# Allegro board BVP_04V2.brd
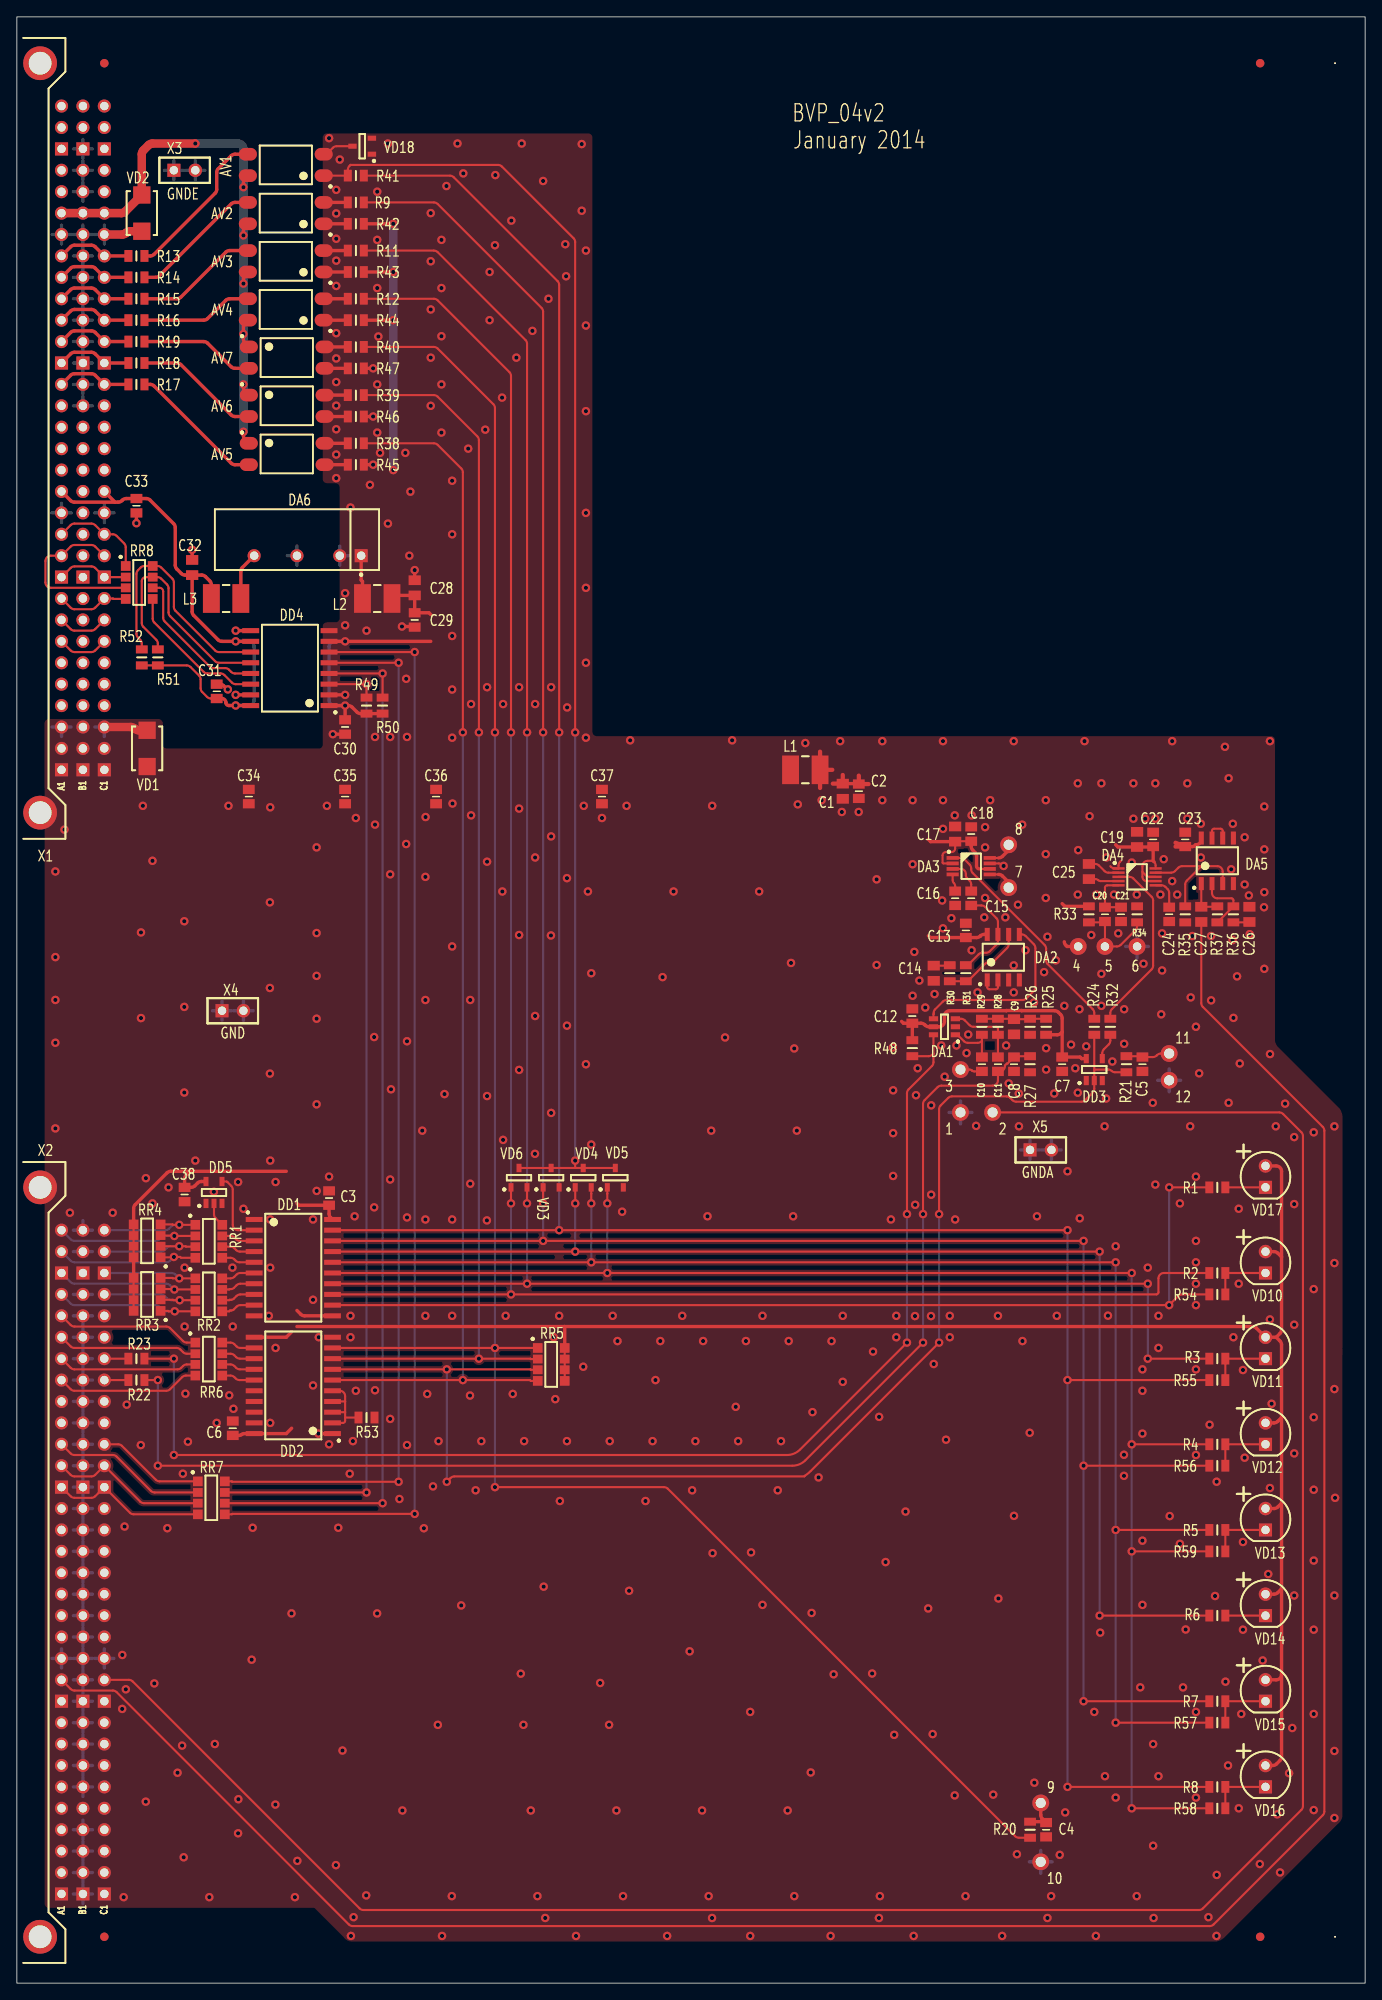
[diagram p0: board, top side]
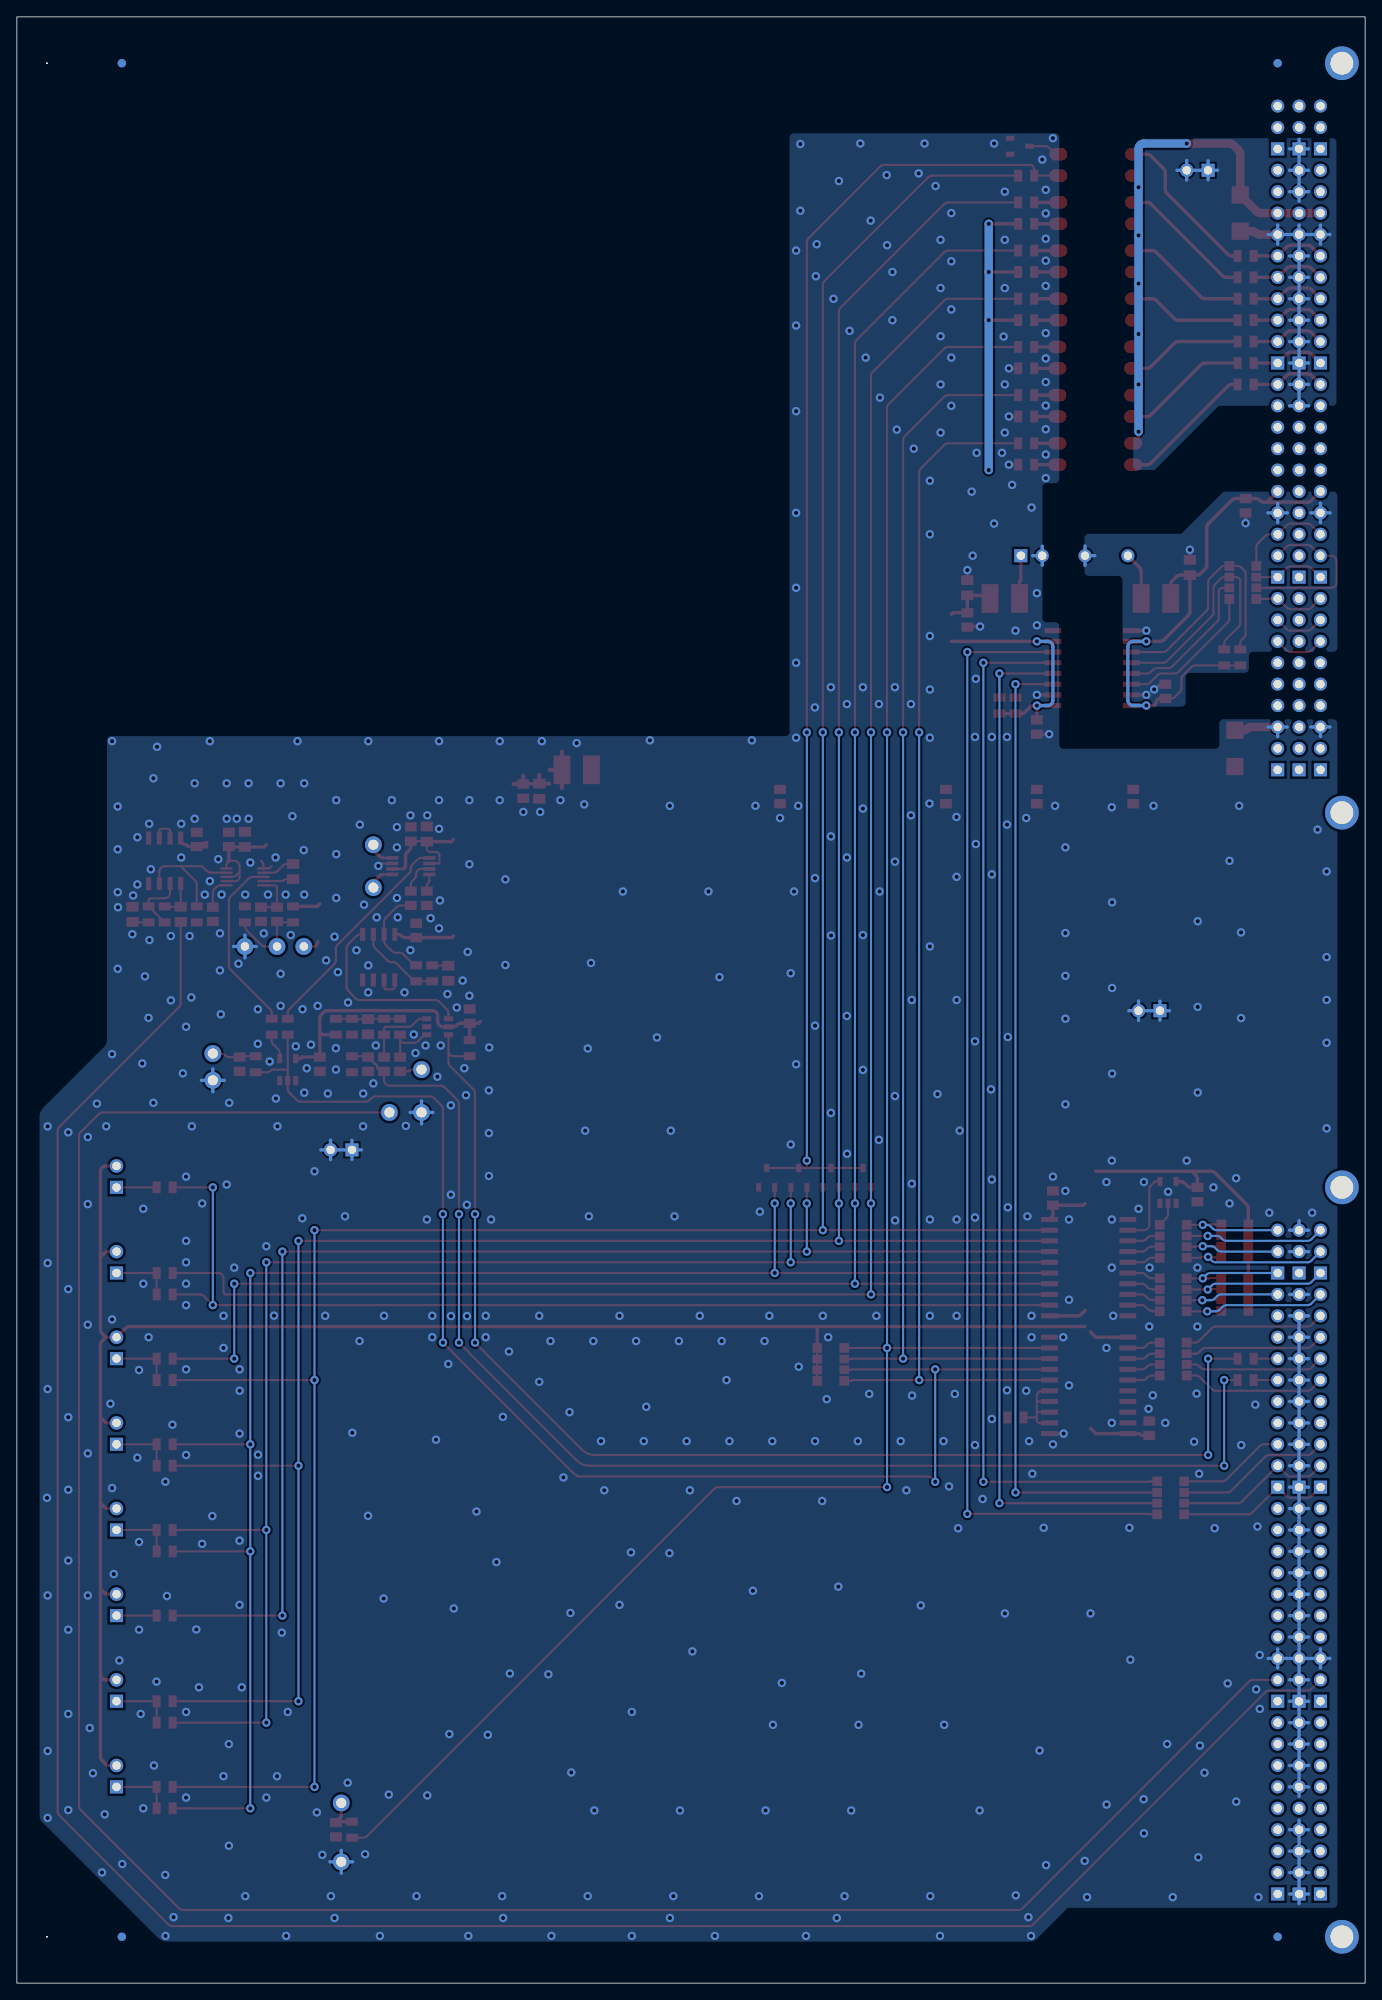
[diagram p1: board, bottom side, seen from below]

Outline 160 x 233.25 mm; copper layers: TOP, BOTTOM. Coordinates in mm from the lower left corner of the outline.
Outline path: rectangle 0,0 160,233.25

## Design rules (mm)
net group PWR: nets +5B +5BA +5BR +24BE GND GNDE GNDR

## Placement (name value [footprint] x y rotation side)
AV1  HCPL-817-300E  [SOIC254P1000X370-4N]  31.91 215.69 180 top
AV2  HCPL-817-300E  [SOIC254P1000X370-4N]  31.91 209.97 180 top
AV3  HCPL-817-300E  [SOIC254P1000X370-4N]  31.91 204.25 180 top
AV4  HCPL-817-300E  [SOIC254P1000X370-4N]  31.91 198.54 180 top
AV5  HCPL-817-300E  [SOIC254P1000X370-4N]  32.02 181.4 0 top
AV6  HCPL-817-300E  [SOIC254P1000X370-4N]  32.02 187.11 0 top
AV7  HCPL-817-300E  [SOIC254P1000X370-4N]  32.02 192.82 0 top
C1  10.0u  [CAPC2013X145N]  98.01 141.39 270 top
C2  0.1u  [CAPC2013X95N]  99.92 141.39 270 top
C3  0.1u  [CAPC2013X95N]  37.05 93.13 90 top
C4  0.1u  [CAPC2013X95N]  122.14 18.2 270 top
C5  0.1u  [CAPC2013X95N]  133.57 109 270 top
C6  0.1u  [CAPC2013X95N]  25.62 65.83 90 top
C7  0.1u  [CAPC2013X95N]  124.05 109 270 top
C8  1000p  [CAPC2013X95N]  118.33 109 270 top
C9  10.0u  [CAPC2013X145N]  118.33 113.45 270 top
C10  0.1u  [CAPC2013X95N]  114.52 109 90 top
C11  0.1u  [CAPC2013X95N]  116.42 109 270 top
C12  0.1u  [CAPC2013X95N]  106.27 114.72 270 top
C13  0.1u  [CAPC2013X95N]  112.61 124.88 270 top
C14  10.0u  [CAPC2013X145N]  108.81 119.8 270 top
C15  0.1u  [CAPC2013X95N]  113.25 128.69 90 top
C16  0.1u  [CAPC2013X95N]  111.34 128.69 90 top
C17  10.0u  [CAPC2013X145N]  111.34 136.31 90 top
C18  0.1u  [CAPC2013X95N]  113.25 136.31 270 top
C19  10.0u  [CAPC2013X145N]  132.94 135.68 90 top
C20  0.1u  [CAPC2013X95N]  129.12 126.78 90 top
C21  1000p  [CAPC2013X95N]  131.03 126.78 90 top
C22  0.1u  [CAPC2013X95N]  134.84 135.68 90 top
C23  0.1u  [CAPC2013X95N]  138.65 135.68 90 top
C24  2.2u  [CAPC2013X95N]  136.75 126.78 270 top
C25  10.0u  [CAPC2013X145N]  127.22 131.87 270 top
C26  10.0u  [CAPC2013X145N]  146.27 126.78 90 top
C27  10.0u  [CAPC2013X145N]  140.56 126.78 270 top
C28  10.0u  [CAPC2013X145N]  47.21 165.52 90 top
C29  0.1u  [CAPC2013X95N]  47.21 161.71 270 top
C30  0.1u  [CAPC2013X95N]  38.95 149.01 270 top
C31  0.1u  [CAPC2013X95N]  23.71 153.24 90 top
C32  10.0u  [CAPC2013X145N]  20.8 167.93 90 top
C33  0.1u  [CAPC2013X95N]  14.19 175.26 270 top
C34  0.1u  [CAPC2013X95N]  27.52 140.75 270 top
C35  0.1u  [CAPC2013X95N]  38.95 140.75 270 top
C36  0.1u  [CAPC2013X95N]  49.75 140.75 270 top
C37  0.1u  [CAPC2013X95N]  69.44 140.75 270 top
C38  0.1u  [CAPC2013X95N]  19.91 93.55 270 top
DA1  TS5A3160  [SOT95P280X145-6N]  110.08 113.45 180 top
DA2  AD8532  [SOIC127P600X175-8N]  117.06 121.7 90 top
DA3  SSM2301  [SOP65P490X110-8N]  113.25 132.5 0 top
DA4  SSM2167  [SOP50P490X110-10N]  132.94 131.23 0 top
DA5  AD8532  [SOIC127P600X175-8N]  142.46 133.13 90 top
DA6  TMA 0505S  [SIP720W50P254L1950H1050Q7P_S1KV]  33.24 171.24 270 top
DD1  74ACT573  [SOIC127P1030X265-20N]  32.81 84.88 0 top
DD2  74ACT573  [SOIC127P1030X265-20N]  32.81 70.91 180 top
DD3  SN74LVC1G14DBV  [SOT95P280X145-5N]  127.86 108.37 90 top
DD4  ADuM3402  [SOIC127P1032X265-16N]  32.4 156 180 top
DD5  SN74LVC1G14DBV  [SOT95P280X145-5N]  23.39 93.8 90 top
L1  10u  [INDC4532X280N]  93.56 143.93 0 top
L2  10u  [INDC4532X280N]  42.77 164.25 180 top
L3  10u  [INDC4532X280N]  24.83 164.25 180 top
MH1  1  [MTG_100_200]  111.98 103.29 0 top
MH2  2  [MTG_100_200]  115.79 103.29 0 top
MH3  3  [MTG_100_200]  111.98 108.37 0 top
MH4  4  [MTG_085_200]  125.95 122.97 0 top
MH5  5  [MTG_085_200]  129.12 122.97 0 top
MH6  6  [MTG_085_200]  132.94 122.97 0 top
MH7  7  [MTG_100_200]  117.69 129.96 0 top
MH8  8  [MTG_100_200]  117.69 135.04 0 top
MH9  9  [MTG_100_200]  121.5 21.38 0 top
MH10  10  [MTG_100_200]  121.5 14.39 0 top
MH11  11  [MTG_100_200]  136.75 110.28 0 top
MH12  12  [MTG_100_200]  136.75 107.1 0 top
NOREF  -  [unnamed]  147.54 5.5 0 top
NOREF#2  -  [unnamed]  10.38 5.5 0 top
NOREF#3  -  [unnamed]  10.38 227.75 0 top
NOREF#4  -  [unnamed#2]  156.43 227.75 0 top
NOREF#5  -  [unnamed#2]  156.43 5.5 0 top
NOREF#6  -  [unnamed]  147.54 227.75 0 top
NOREF#7  -  [unnamed]  10.38 5.5 180 bottom
NOREF#8  -  [unnamed]  10.38 227.75 180 bottom
NOREF#9  -  [unnamed]  147.54 227.75 180 bottom
NOREF#10  -  [unnamed]  147.54 5.5 180 bottom
R1  1k  [RESC2013X60N]  142.46 94.4 0 top
R2  5.1k  [RESC2013X60N]  142.46 84.24 0 top
R3  5.1k  [RESC2013X60N]  142.46 74.08 0 top
R4  5.1k  [RESC2013X60N]  142.46 63.92 0 top
R5  5.1k  [RESC2013X60N]  142.46 53.76 0 top
R6  5.1k  [RESC2013X60N]  142.46 43.6 0 top
R7  5.1k  [RESC2013X60N]  142.46 33.44 0 top
R8  5.1k  [RESC2013X60N]  142.46 23.28 0 top
R9  510  [RESC2013X60N]  40.23 211.24 180 top
R11  510  [RESC2013X60N]  40.23 205.53 180 top
R12  510  [RESC2013X60N]  40.23 199.81 180 top
R13  2k  [RESC2013X60N]  14.19 204.89 180 top
R14  2k  [RESC2013X60N]  14.19 202.35 180 top
R15  2k  [RESC2013X60N]  14.19 199.81 180 top
R16  2k  [RESC2013X60N]  14.19 197.27 180 top
R17  2k  [RESC2013X60N]  14.19 189.65 0 top
R18  2k  [RESC2013X60N]  14.19 192.19 0 top
R19  2k  [RESC2013X60N]  14.19 194.73 0 top
R20  100  [RESC2013X60N]  120.23 18.2 270 top
R21  100  [RESC2013X60N]  131.66 109 270 top
R22  100k  [RESC2013X60N]  14.19 71.54 0 top
R23  100  [RESC2013X60N]  14.19 74.08 0 top
R24  100  [RESC2013X60N]  127.86 113.45 90 top
R25  1k  [RESC2013X60N]  122.14 113.45 270 top
R26  1k  [RESC2013X60N]  120.23 113.45 90 top
R27  10k  [RESC2013X60N]  120.23 109 270 top
R28  100k  [RESC2013X60N]  116.42 113.45 270 top
R29  100k  [RESC2013X60N]  114.52 113.45 270 top
R30  10k  [RESC2013X60N]  110.71 119.8 270 top
R31  20k  [RESC2013X60N]  112.61 119.8 90 top
R32  100  [RESC2013X60N]  129.76 113.45 90 top
R33  5.1k  [RESC2013X60N]  127.22 126.78 90 top
R34  20k  [RESC2013X60N]  132.94 126.78 270 top
R35  20k  [RESC2013X60N]  138.65 126.78 90 top
R36  10k  [RESC2013X60N]  144.37 126.78 90 top
R37  20k  [RESC2013X60N]  142.46 126.78 90 top
R38  51  [RESC2013X60N]  40.23 182.66 0 top
R39  51  [RESC2013X60N]  40.23 188.38 0 top
R40  51  [RESC2013X60N]  40.23 194.09 0 top
R41  1k  [RESC2013X60N]  40.23 214.41 180 top
R42  510  [RESC2013X60N]  40.23 208.7 180 top
R43  510  [RESC2013X60N]  40.23 202.99 180 top
R44  510  [RESC2013X60N]  40.23 197.27 180 top
R45  51  [RESC2013X60N]  40.23 180.12 0 top
R46  51  [RESC2013X60N]  40.23 185.84 0 top
R47  51  [RESC2013X60N]  40.23 191.56 0 top
R48  10k  [RESC2013X60N]  106.27 110.91 90 top
R49  10k  [RESC2013X60N]  41.49 151.55 270 top
R50  10k  [RESC2013X60N]  43.4 151.55 270 top
R51  10k  [RESC2013X60N]  16.73 157.26 270 top
R52  10k  [RESC2013X60N]  14.82 157.26 270 top
R53  10k  [RESC2013X60N]  41.49 67.09 180 top
R54  5.1k  [RESC2013X60N]  142.46 81.7 0 top
R55  5.1k  [RESC2013X60N]  142.46 71.54 0 top
R56  5.1k  [RESC2013X60N]  142.46 61.38 0 top
R57  5.1k  [RESC2013X60N]  142.46 30.9 0 top
R58  5.1k  [RESC2013X60N]  142.46 20.74 0 top
R59  5.1k  [RESC2013X60N]  142.46 51.22 0 top
RR1  100  [RESCAX127P320X508X70-8N]  22.77 88 0 top
RR2  100  [RESCAX127P320X508X70-8N]  22.77 81.65 0 top
RR3  10k  [RESCAX127P320X508X70-8N]  15.46 81.7 180 top
RR4  10k  [RESCAX127P320X508X70-8N]  15.46 88.05 180 top
RR5  10k  [RESCAX127P320X508X70-8N]  63.41 73.39 0 top
RR6  100  [RESCAX127P320X508X70-8N]  22.77 74.03 0 top
RR7  100  [RESCAX127P320X508X70-8N]  23.08 57.57 0 top
RR8  100  [RESCAX127P320X508X70-8N]  14.52 166.16 0 top
VD1  6.8B  [DIOM5236X261N_NP]  15.46 146.47 90 top
VD2  30B  [DIOM5236X261N_NP]  14.82 209.97 270 top
VD3  BAT54A  [SOT95P230X110-3N]  63.4 95.55 90 top
VD4  BAT54A  [SOT95P230X110-3N]  67.21 95.55 90 top
VD5  BAT54A  [SOT95P230X110-3N]  71.02 95.55 90 top
VD6  BAT54A  [SOT95P230X110-3N]  59.59 95.55 90 top
VD10  Red  [LEDRD254W60D590H900USR]  148.18 85.51 90 top
VD11  Red  [LEDRD254W60D590H900USR]  148.18 75.35 90 top
VD12  Red  [LEDRD254W60D590H900USR]  148.18 65.19 90 top
VD13  Red  [LEDRD254W60D590H900USR]  148.18 55.03 90 top
VD14  Red  [LEDRD254W60D590H900USR]  148.18 44.87 90 top
VD15  Red  [LEDRD254W60D590H900USR]  148.18 34.71 90 top
VD16  Red  [LEDRD254W60D590H900USR]  148.18 24.55 90 top
VD17  Green  [LEDRD254W60D590H900USR]  148.18 95.67 90 top
VD18  BAT54A  [SOT95P230X110-3N]  40.98 217.91 180 top
X1  DIN-32x3  [DIN_41612_96_MR]  2.12 183.3 0 top
X2  DIN-32x3  [DIN_41612_96_MR]  2.12 49.95 0 top
X3  GNDE  [HDRV1X2P254]  19.91 215.05 0 top
X4  GND  [HDRV1X2P254]  25.62 115.36 0 top
X5  GNDA  [HDRV1X2P254]  121.5 98.84 0 top

## Library data of the parts
AV1-AV7 = K1010: alternate symbols: (SOIC254P1000X370-4M)
C1-C38 = CAP_NP
DA1 = TS5A3159_g
DA2 DA5 = AD8532AR_G
DA3 = SSM2301_G
DA4 = SSM2167_G
DA6 = SIP7_SINGLE_4_6
DD1 DD2 = 74ACT573
DD3 DD5 = 74LVC1G14_G
DD4 = ADUM3402
L1-L3 = INDUCTOR
MH1-MH12 = MOUNTING_HOLE_PLATED
R1-R9 R11-R59 = RES_0.125W
RR1-RR8 = RES_ARRAY_4
VD1 VD2 = DIODE_TVS_BI
VD3-VD6 VD18 = DIODE_SCHOTTKY_DUAL_A
VD10-VD17 = DIODE_LED
X1 X2 = CON_32x3
X3-X5 = CON_2

## Footprints (pads in the part's own frame, mm; a bottom-side part is the same pattern mirrored in y, then rotated)
CAPC2013X95N
  rect 1.1x1.4 smd: 1(-0.85,0) 2(0.85,0)
CAPC2013X145N
  rect 1.15x1.45 smd: 1(-0.9,0) 2(0.9,0)
DIN_41612_96_MR
  rect 1.55x1.55 hole 1: A1(3.175,-39.37) A10(3.175,-16.51) A20(3.175,8.89) A30(3.175,34.29) B1(5.715,-39.37) B10(5.715,-16.51) B20(5.715,8.89) B30(5.715,34.29) C1(8.255,-39.37) C10(8.255,-16.51) C20(8.255,8.89) C30(8.255,34.29)
  round 1.55 hole 1: A2(3.175,-36.83) A3(3.175,-34.29) A4(3.175,-31.75) A5(3.175,-29.21) A6(3.175,-26.67) A7(3.175,-24.13) A8(3.175,-21.59) A9(3.175,-19.05) A11(3.175,-13.97) A12(3.175,-11.43) A13(3.175,-8.89) A14(3.175,-6.35) A15(3.175,-3.81) A16(3.175,-1.27) A17(3.175,1.27) A18(3.175,3.81) A19(3.175,6.35) A21(3.175,11.43) A22(3.175,13.97) A23(3.175,16.51) A24(3.175,19.05) A25(3.175,21.59) A26(3.175,24.13) A27(3.175,26.67) A28(3.175,29.21) A29(3.175,31.75) A31(3.175,36.83) A32(3.175,39.37) B2(5.715,-36.83) B3(5.715,-34.29) B4(5.715,-31.75) B5(5.715,-29.21) B6(5.715,-26.67) B7(5.715,-24.13) B8(5.715,-21.59) B9(5.715,-19.05) B11(5.715,-13.97) B12(5.715,-11.43) B13(5.715,-8.89) B14(5.715,-6.35) B15(5.715,-3.81) B16(5.715,-1.27) B17(5.715,1.27) B18(5.715,3.81) B19(5.715,6.35) B21(5.715,11.43) B22(5.715,13.97) B23(5.715,16.51) B24(5.715,19.05) B25(5.715,21.59) B26(5.715,24.13) B27(5.715,26.67) B28(5.715,29.21) B29(5.715,31.75) B31(5.715,36.83) B32(5.715,39.37) C2(8.255,-36.83) C3(8.255,-34.29) C4(8.255,-31.75) C5(8.255,-29.21) C6(8.255,-26.67) C7(8.255,-24.13) C8(8.255,-21.59) C9(8.255,-19.05) C11(8.255,-13.97) C12(8.255,-11.43) C13(8.255,-8.89) C14(8.255,-6.35) C15(8.255,-3.81) C16(8.255,-1.27) C17(8.255,1.27) C18(8.255,3.81) C19(8.255,6.35) C21(8.255,11.43) C22(8.255,13.97) C23(8.255,16.51) C24(8.255,19.05) C25(8.255,21.59) C26(8.255,24.13) C27(8.255,26.67) C28(8.255,29.21) C29(8.255,31.75) C31(8.255,36.83) C32(8.255,39.37)
  round 4 hole 2.7: HOLE1(0.635,-44.45) HOLE2(0.635,44.45)
DIOM5236X261N_NP
  rect 2.05x2.05 smd: A(2.15,0) C(-2.15,0)
HDRV1X2P254
  rect 1.55x1.55 hole 1: 1(-1.27,0)
  round 1.6 hole 1: 2(1.27,0)
INDC4532X280N
  rect 2x3.4 smd: 1(-1.75,0) 2(1.75,0)
LEDRD254W60D590H900USR
  round 1.6 hole 1: A(1.27,0)
  rect 1.55x1.55 hole 1: C(-1.27,0)
MTG_085_200
  round 2 hole 1: 1(0,0)
MTG_100_200
  round 2 hole 1.2: 1(0,0)
RESC2013X60N
  rect 0.95x1.4 smd: 1(-0.95,0) 2(0.95,0)
RESCAX127P320X508X70-8N
  rect 1.15x1.15 smd: 1(-1.6,1.955) 4(-1.6,-1.955) 5(1.6,-1.955) 8(1.6,1.955)
  rect 1.15x1.05 smd: 2(-1.6,0.635) 3(-1.6,-0.635) 6(1.6,-0.635) 7(1.6,0.635)
SIP720W50P254L1950H1050Q7P_S1KV
  rect 1.55x1.55 hole 1: 1(1.905,7.62)
  round 1.55 hole 1: 2(1.905,5.08) 4(1.905,0) 6(1.905,-5.08)
SOIC127P600X175-8N
  rect 1.55x0.6 smd: 1(-2.7,1.905) 2(-2.7,0.635) 3(-2.7,-0.635) 4(-2.7,-1.905) 5(2.7,-1.905) 6(2.7,-0.635) 7(2.7,0.635) 8(2.7,1.905)
SOIC127P1030X265-20N
  rect 2x0.6 smd: 1(-4.65,5.715) 2(-4.65,4.445) 3(-4.65,3.175) 4(-4.65,1.905) 5(-4.65,0.635) 6(-4.65,-0.635) 7(-4.65,-1.905) 8(-4.65,-3.175) 9(-4.65,-4.445) 10(-4.65,-5.715) 11(4.65,-5.715) 12(4.65,-4.445) 13(4.65,-3.175) 14(4.65,-1.905) 15(4.65,-0.635) 16(4.65,0.635) 17(4.65,1.905) 18(4.65,3.175) 19(4.65,4.445) 20(4.65,5.715)
SOIC127P1032X265-16N
  rect 2x0.6 smd: 1(-4.65,4.445) 2(-4.65,3.175) 3(-4.65,1.905) 4(-4.65,0.635) 5(-4.65,-0.635) 6(-4.65,-1.905) 7(-4.65,-3.175) 8(-4.65,-4.445) 9(4.65,-4.445) 10(4.65,-3.175) 11(4.65,-1.905) 12(4.65,-0.635) 13(4.65,0.635) 14(4.65,1.905) 15(4.65,3.175) 16(4.65,4.445)
SOIC254P1000X370-4N
  oval 2.15x1.5 smd: 1(-4.5,1.27) 2(-4.5,-1.27) 3(4.5,-1.27) 4(4.5,1.27)
SOP50P490X110-10N
  rect 1.45x0.3 smd: 1(-2.2,1) 2(-2.2,0.5) 3(-2.2,0) 4(-2.2,-0.5) 5(-2.2,-1) 6(2.2,-1) 7(2.2,-0.5) 8(2.2,0) 9(2.2,0.5) 10(2.2,1)
SOP65P490X110-8N
  rect 1.45x0.45 smd: 1(-2.2,0.975) 2(-2.2,0.325) 3(-2.2,-0.325) 4(-2.2,-0.975) 5(2.2,-0.975) 6(2.2,-0.325) 7(2.2,0.325) 8(2.2,0.975)
SOT95P230X110-3N
  rect 1x0.6 smd: 1(-1.15,0.95) 2(-1.15,-0.95) 3(1.15,0)
SOT95P280X145-5N
  rect 1.1x0.6 smd: 1(-1.3,0.95) 2(-1.3,0) 3(-1.3,-0.95) 4(1.3,-0.95) 5(1.3,0.95)
SOT95P280X145-6N
  rect 1.1x0.6 smd: 1(-1.3,0.95) 2(-1.3,0) 3(-1.3,-0.95) 4(1.3,-0.95) 5(1.3,0) 6(1.3,0.95)
unnamed
  round 1 smd: (0,0)
unnamed#2
  round 0.2 hole 2.7 unplated: (0,0)

## Nets
GND: C1.2 C2.2 C3.2 C4.2 C5.2 C6.2 C7.2 C8.2 C9.2 C12.1 C13.1 C14.2 C16.1 C17.2 C18.1 C19.2 C21.1 C22.2 C23.2 C24.2 C26.2 C28.2 C29.2 C30.2 C34.2 C35.2 C36.2 C37.2 C38.2 DA1.2(GND) DA2.3(IN+) DA2.4(GND) DA3.7(GND) DA4.1(GND) DA5.4(GND) DA5.5(IN+) DA6.2(-VIN) DD1.1(O\E\) DD1.10(GND) DD2.1(O\E\) DD2.10(GND) DD3.3(GND) DD4.2(1GND1) DD4.8(2GND1) DD5.3(GND) MH1.1 MH6.1 MH10.1 MH12.1 R26.1 R27.2 R34.1 R35.1 R45.2 R46.2 R47.2 R53.1 VD1.A VD18.1(C1) X1.A3 X1.C3 X2.A12 X2.B1 X2.B2 X2.B3 X2.B4 X2.B6 X2.B7 X2.B8 X2.B9 X2.B10 X2.B11 X2.B12 X2.B13 X2.B14 X2.B15 X2.B16 X2.B17 X2.B18 X2.B19 X2.B20 X2.B21 X2.B22 X2.B23 X2.B24 X2.B25 X2.B26 X2.B27 X2.B28 X2.B29 X2.B30 X2.B31 X2.B32 X2.C12 X4.1 X4.2 X5.1 X5.2
GNDE: VD2.A X1.A26 X1.B15 X1.B16 X1.B17 X1.B18 X1.B19 X1.B20 X1.B21 X1.B22 X1.B23 X1.B24 X1.B25 X1.B26 X1.B28 X1.B29 X1.B30 X1.B31 X1.B32 X1.C26 X3.1 X3.2
GNDR: C31.2 C32.2 C33.2 DA6.4(-VOUT) DD4.9(2GND2) DD4.15(1GND2) X1.A13 X1.C13
1#PRD: R15.2 X1.A23 X1.C23
1#PRM: R16.2 X1.A22 X1.C22
1#WARN: R14.2 X1.A24 X1.C24
1ALARM: R13.2 X1.A25 X1.C25
1CLEAR: R18.1 X1.A20 X1.C20
1CTRLTM: R17.1 X1.A19 X1.C19
1PUSK: R19.1 X1.A21 X1.C21
1RXDR: X1.A8 X1.C8
1RXLN: RR8.2 X1.A10 X1.C10
1RXTM: RR8.1 X1.A12 X1.C12
1TXDR: X1.A7 X1.C7
1TXLN: RR8.4 X1.A9 X1.C9
1TXTM: RR8.3 X1.A11 X1.C11
+5B: C3.1 C6.1 C28.1 C29.1 C30.1 C34.1 C35.1 C36.1 C37.1 C38.1 DD1.11(LE) DD1.20(VCC) DD2.11(LE) DD2.20(VCC) DD4.1(VCC1) DD4.7(EN1) DD5.5(VCC) L1.1 L2.1 R42.1 R43.1 R44.1 R49.2 R50.2 RR3.5 RR3.6 RR3.7 RR3.8 RR4.5 RR4.6 RR4.7 RR4.8 RR5.5 RR5.6 RR5.7 RR5.8 VD1.C VD10.A VD11.A VD12.A VD13.A VD14.A VD15.A VD16.A VD17.A X1.A1 X1.A2 X1.C1 X1.C2
+5BA: C1.1 C2.1 C7.1 C12.2 C13.2 C17.1 C18.2 C19.1 C22.1 C23.1 DA1.5(VCC) DA2.8(VCC) DA3.2(G) DA3.6(VCC) DA4.7(GATE) DA4.8(CMP) DA4.10(VCC) DA5.8(VCC) DD3.5(VCC) L1.2 MH4.1 R25.2 R33.2 R48.2
+5BR: C31.1 C32.1 C33.1 DD4.10(EN2) DD4.16(VCC2) L3.2 R51.2 R52.2 X1.A14 X1.C14
+24BE: AV1.4 AV2.4 AV3.4 AV4.4 AV5.1 AV6.1 AV7.1 VD2.C X1.A27 X1.B27 X1.C27
BUSR4: RR6.1 X2.A28
BUSR5: RR6.2 X2.A27
BUSR6: RR6.3 X2.A26
BUSR7: RR6.4 X2.A25
BUSW4: X2.C28
BUSW5: X2.C27
BUSW6: R23.1 X2.C26
BUSW7: R22.1 X2.C25
D#AC: DD1.17(Q3) R6.1 VD4.1(C1)
D#CONTROL: DD1.12(Q8) R1.1 R54.1
D#CURRENT: DD1.13(Q7) R2.1 R12.1 VD6.1(C1)
D#DISTPRM: DD1.16(Q4) R5.1 R57.1 VD4.2(C2)
D#HFRESTORE: DD1.14(Q6) R3.1 R11.1 VD6.2(C2)
D#SELFPRM: DD1.15(Q5) R4.1 R58.1 R59.1 VD5.1(C1)
D#WARN: DD1.18(Q2) R7.1 R9.1 R56.1 VD3.1(C1)
DALARM: DD1.19(Q1) R8.1 R41.1 R55.1
EN_AMP: DD2.7(D6) DD3.2(IN) R21.2 R24.1 RR5.3
EN_MCU: DD3.4(OUT) R32.1
RXLN: RR7.2 X2.A22
RXTALK: C27.2 X2.A11
RXTM: RR7.4 X2.A20 X2.C20
SOUT0: RR2.4 RR3.1 X2.A29
SOUT1: RR2.3 RR3.2 X2.C29
SOUT2: RR2.2 RR3.3 X2.A30
SOUT3: RR2.1 RR3.4 X2.C30
SOUT4: RR1.4 RR4.1 X2.A31
SOUT5: RR1.3 RR4.2 X2.C31
SOUT6: RR1.2 RR4.3 X2.A32
SOUT7: RR1.1 RR4.4 X2.C32
TXLN: RR7.1 X2.C22
TXTALK: MH2.1 X2.C11
TXTM: RR7.3 X2.A21 X2.C21
N00551: AV7.3 R47.1
N01225: DD4.3(INA) R49.1 RR7.7
N01244: DD4.5(OUTC) RR7.8
N01250: DD4.6(OUTD) RR7.5
N01425: DD4.13(OUTB) RR8.6
N01429: DD4.12(INC) R51.1 RR8.7
N01441: DD4.11(IND) R52.1 RR8.8
N01449: DD4.14(OUTA) RR8.5
N02822: DA6.6(+VOUT) L3.1
N02871: DA6.1(+VIN) L2.2
N73819: DD2.8(D7) R39.2 RR5.2
N73834: DD2.9(D8) R20.2 R40.2 RR5.1
N73844: AV6.3 R46.1
N73856: AV5.3 R45.1
N77519: C10.2 DA1.1(NO) R29.2
N77917: DA1.6(#) R23.2 R48.1
N79355: R1.2 VD17.C
N79397: R2.2 R54.2 VD10.C
N79439: R3.2 R55.2 VD11.C
N79481: R4.2 R56.2 VD12.C
N79523: R5.2 R59.2 VD13.C
N79549: R6.2 VD14.C
N79567: DA1.4(COM) DA2.5(IN+)
N79607: R7.2 R57.2 VD15.C
N79649: R8.2 R58.2 VD16.C
N79970: C15.1 DA2.7(OUT) R31.2
N79985: DA2.6(IN-) R30.2 R31.1
N80056: C14.1 R30.1
N80092: DA2.1(OUT) DA2.2(IN-)
N80558: C15.2 DA3.3(IN+)
N80562: C16.2 DA3.4(IN-)
N80654: AV1.3 R13.1
N80678: DA3.1(EN) R24.2
N80919: AV2.3 R14.1
N81113: AV3.3 R15.1
N81310: AV4.3 R16.1
N82115: AV2.2 R9.2
N82193: AV3.2 R11.2
N82271: AV4.2 R12.2
N83320: C9.1 R25.1 R26.2 R28.1 R29.1
N83604: C11.1 DA1.3(NC) R28.2
N83683: AV3.1 R43.2
N83687: AV4.1 R44.2
N83741: AV2.1 R42.2
N85109: C8.1 C11.2 R22.2 R27.1
N94026: DA3.5(OUT+) MH7.1
N94035: DA3.8(OUT-) MH8.1
N96238: C20.2 C21.2 DA4.5(IN)
N96360: C25.1 DA4.2(VCA)
N96364: C25.2 DA4.4(BUF)
N96415: C24.1 DA4.6(AVG)
N96583: DA4.3(EN) R32.2
N96714: DA4.9(OUT) DA5.3(IN+) R35.2
N97065: C27.1 DA5.1(OUT) R37.2
N97073: DA5.2(IN-) R36.2 R37.1
N97121: C26.1 R36.1
N97223: DA5.6(IN-) DA5.7(OUT)
N99861: C20.1 MH5.1 R33.1 R34.2
N109598: AV1.1 R41.2 VD3.3(M) VD4.3(M) VD5.3(M) VD6.3(M)
N127058: DD4.4(INB) R50.1 RR7.6
N133699: C10.1 MH3.1
N148228: DD1.3(D2) RR1.7
N148236: DD1.4(D3) RR1.6
N148244: DD1.5(D4) RR1.5
N172935: AV5.4 R38.1
N172939: DD2.6(D5) R38.2 RR5.4
N172947: AV6.4 R39.1
N172960: AV7.4 R40.1
N176118: DD2.15(Q5) RR6.5
N176122: DD2.14(Q6) RR6.6
N176130: DD2.13(Q7) RR6.7
N176164: DD2.12(Q8) RR6.8
N178870: DD1.6(D5) RR2.8
N178876: DD1.7(D6) RR2.7
N178882: DD1.9(D8) RR2.5
N178888: DD1.8(D7) RR2.6
N182039: AV6.2 R18.2
N182065: AV7.2 R19.2
N182113: AV5.2 R17.2
N182772: DD2.2(D1) DD2.3(D2) DD2.4(D3) DD2.5(D4) R53.2
N194967: DD5.2(IN) RR1.8
N194988: DD1.2(D1) DD5.4(OUT)
N204692: C4.1 MH9.1 R20.1
N206929: C5.1 MH11.1 R21.1
N208084: AV1.2 VD18.3(M)

Pads without a net: DD2 16 17 18 19; DD3 1; DD5 1; VD3 2; VD5 2; VD18 2; X1 A4 A5 A6 A15 A16 A17 A18 A28 A29 A30 A31 A32 B1 B2 B3 B4 B5 B6 B7 B8 B9 B10 B11 B12 B13 B14 C4 C5 C6 C15 C16 C17 C18 C28 C29 C30 C31 C32 HOLE1 HOLE2; X2 A1 A2 A3 A4 A5 A6 A7 A8 A9 A10 A13 A14 A15 A16 A17 A18 A19 A23 A24 B5 C1 C2 C3 C4 C5 C6 C7 C8 C9 C10 C13 C14 C15 C16 C17 C18 C19 C23 C24 HOLE1 HOLE2

## Via types
v1: diameter 1, hole 0.5, TOP to BOTTOM, 683 vias

## Routing (per net, layer and track width the routed paths; a pad name or vN(x,y) marks a point on that pad's centre or on a via; arc(x,y) is an arc through that point)
GND: length 207.6
  TOP w0.25: DA3.7 116.54,132.82 arc(116.78,132.78) 116.99,132.64 v1(117.1,132.53) ; 129.76,132.5 129.84,132.42 arc(130.05,132.28) 130.29,132.23 DA4.1 130.74,132.58 arc(130.78,132.82) 130.92,133.03 131.03,133.13
  TOP w0.4: C30.2 v1(37.5,148.16) ; R47.2 v1(42.28,191.56) ; R46.2 v1(42.28,185.84) ; R45.2 v1(42.28,180.12) ; C28.2 v1(47.21,167.62) ; C29.2 47.14,160.93 v1(45.7,160.93) ; DD2.1 v1(35.78,65.19) ; DD4.2 v1(38.95,152.82)
  TOP w1: X1.C3 13.53,149.01 arc(13.77,148.96) 13.98,148.82 14,148.81 arc(14.2,148.67) 14.45,148.62 VD1.A
  BOTTOM w0.4: X2.C12 11.51,38.52 ; X2.C12 10.38,37.39 ; X2.C12 10.38,39.65 ; X2.C12 9.25,38.52 ; 131.58,122.97 MH6.1 ; MH6.1 132.94,124.33 ; MH6.1 132.94,121.62 ; MH6.1 134.29,122.97 ; MH12.1 138.1,107.1 ; MH12.1 136.75,108.45 ; MH12.1 136.75,105.75 ; MH12.1 135.39,107.1 ; X2.B7 8.97,25.82 ; X2.B7 6.71,25.82 ; X2.B7 7.84,24.69 ; X2.B7 7.84,26.95 ; 6.71,46.14 X2.B15 ; X2.B15 7.84,45.01 ; X2.B15 7.84,47.27 ; X2.B15 8.97,46.14 ; 7.84,57.71 X2.B20 ; X2.B20 8.97,58.84 ; X2.B20 7.84,59.97 ; X2.B20 6.71,58.84 ; 122.78,98.84 123.93,98.84 ; 122.78,98.84 121.62,98.84 ; 122.78,98.84 122.78,100 ; 122.78,98.84 122.78,97.69 ; 38.32,168.2 DA6.2 ; DA6.2 39.45,169.33 ; DA6.2 38.32,170.46 ; 7.84,37.39 X2.B12 ; X2.B12 7.84,39.65 ; X2.B12 8.97,38.52 ; X2.B12 6.71,38.52 ; 7.84,50.09 X2.B17 ; X2.B17 8.97,51.22 ; X2.B17 7.84,52.35 ; X2.B17 6.71,51.22 ; X2.B14 8.97,43.6 ; X2.B14 6.71,43.6 ; X2.B14 7.84,42.47 ; X2.B14 7.84,44.73 ; 7.84,39.93 X2.B13 ; X2.B13 7.84,42.19 ; X2.B13 8.97,41.06 ; X2.B13 6.71,41.06 ; 7.84,9.45 X2.B1 ; X2.B1 8.97,10.58 ; X2.B1 7.84,11.71 ; X2.B1 6.71,10.58 ; X2.B10 7.84,34.57 ; X2.B10 6.71,33.44 ; X2.B10 7.84,32.31 ; X2.B10 8.97,33.44 ; X2.B25 8.97,71.54 ; X2.B25 7.84,70.41 ; X2.B25 7.84,72.67 ; X2.B25 6.71,71.54 ; 5.3,147.88 X1.A3 ; X1.A3 6.43,149.01 ; X1.A3 4.17,149.01 ; 7.84,62.79 X2.B22 ; X2.B22 8.97,63.92 ; X2.B22 7.84,65.05 ; X2.B22 6.71,63.92 ; X2.B27 7.84,77.75 ; X2.B27 6.71,76.62 ; X2.B27 7.84,75.49 ; X2.B27 8.97,76.62 ; 8.97,86.78 X2.B31 6.71,86.78 ; X2.B2 7.84,14.25 ; X2.B2 7.84,11.99 ; X2.B2 6.71,13.12 ; X2.B2 8.97,13.12 ; 7.84,55.17 X2.B19 ; X2.B19 8.97,56.3 ; X2.B19 6.71,56.3 ; X2.B19 7.84,57.43 ; 7.84,60.25 X2.B21 ; X2.B21 6.71,61.38 ; X2.B21 7.84,62.51 ; X2.B21 8.97,61.38 ; 25.74,115.36 X4.2 ; X4.2 28.04,115.36 ; X4.2 26.89,116.51 ; X4.2 26.89,114.2 ; X2.B32 8.97,89.32 ; X2.B32 6.71,89.32 ; X2.B32 7.84,90.45 ; X2.A12 6.43,38.52 ; X2.A12 5.3,37.39 ; X2.A12 4.17,38.52 ; X2.A12 5.3,39.65 ; 6.71,79.16 X2.B28 ; X2.B28 7.84,78.03 ; X2.B28 8.97,79.16 ; 7.84,65.33 X2.B23 ; X2.B23 7.84,67.59 ; X2.B23 6.71,66.46 ; X2.B23 8.97,66.46 ; 8.97,81.7 X2.B29 6.71,81.7 ; X2.B8 8.97,28.36 ; X2.B8 7.84,27.23 ; X2.B8 7.84,29.49 ; X2.B8 6.71,28.36 ; 6.71,69 X2.B24 ; X2.B24 8.97,69 ; X2.B24 7.84,70.13 ; X2.B24 7.84,67.87 ; 6.71,74.08 X2.B26 ; X2.B26 7.84,72.95 ; X2.B26 7.84,75.21 ; X2.B26 8.97,74.08 ; X2.B18 8.97,53.76 ; X2.B18 6.71,53.76 ; X2.B18 7.84,54.89 ; X2.B18 7.84,52.63 ; MH10.1 121.5,15.74 ; MH10.1 122.86,14.39 ; MH10.1 120.15,14.39 ; MH10.1 121.5,13.04 ; 10.38,147.88 X1.C3 ; X1.C3 9.25,149.01 ; X1.C3 11.51,149.01 ; 119.11,98.84 X5.1 ; X5.1 121.36,98.84 ; X5.1 120.23,99.97 ; X5.1 120.23,97.72 ; 23.22,115.36 X4.1 ; X4.1 25.48,115.36 ; X4.1 24.35,114.23 ; X4.1 24.35,116.48 ; X2.B16 8.97,48.68 ; X2.B16 7.84,49.81 ; X2.B16 7.84,47.55 ; X2.B16 6.71,48.68 ; X2.B9 8.97,30.9 ; X2.B9 7.84,29.77 ; X2.B9 7.84,32.03 ; X2.B9 6.71,30.9 ; X2.B6 8.97,23.28 ; X2.B6 7.84,22.15 ; X2.B6 6.71,23.28 ; X2.B6 7.84,24.41 ; 6.71,35.98 X2.B11 ; X2.B11 7.84,34.85 ; X2.B11 7.84,37.11 ; X2.B11 8.97,35.98 ; 6.71,15.66 X2.B3 ; X2.B3 7.84,16.79 ; X2.B3 8.97,15.66 ; X2.B3 7.84,14.53 ; 7.84,17.07 X2.B4 ; X2.B4 6.71,18.2 ; X2.B4 7.84,19.33 ; X2.B4 8.97,18.2 ; MH1.1 111.98,104.64 ; MH1.1 111.98,101.94 ; MH1.1 110.63,103.29 ; MH1.1 113.33,103.29
  vias: v1(4.57,131.87) v1(4.57,121.71) v1(4.57,116.63) v1(4.57,111.55) v1(4.57,101.39) v1(5.65,136.84) v1(6.29,91.39) v1(11.37,91.39) v1(12.52,38.93) v1(12.5,32.53) v1(12.68,10.2) v1(12.78,54.16) v1(12.93,34.86) v1(13.04,68.62) v1(14.73,124.64) v1(14.73,114.48) v1(14.71,63.83) v1(14.95,139.66) v1(15.31,95.49) v1(15.3,21.53) v1(16.09,133.13) v1(16.09,92.5) v1(16.31,35.55) v1(17.86,53.97) v1(18,94.4) v1(19.07,24.96) v1(19.61,28.18) v1(19.7,60.43) v1(19.8,14.93) v1(19.87,125.97) v1(19.87,115.81) v1(19.87,105.65) v1(19.91,84.88) v1(19.91,77.89) v1(20,69.93) v1(20.3,64.23) v1(21.18,97.58) v1(22.84,10.2) v1(23.38,93.88) v1(23.5,28.37) v1(23.71,66.46) v1(25.11,139.66) v1(25.2,69.73) v1(25.58,84.88) v1(25.62,77.89) v1(25.7,68.13) v1(26.25,95.03) v1(26.29,21.82) v1(26.25,17.78) v1(26.89,91.86) v1(27.86,38.37) v1(27.98,54.02) v1(29.9,79.16) v1(30.03,128.21) v1(30.03,118.05) v1(30.03,107.89) v1(30.07,139.49) v1(30.07,97.58) v1(30.07,90.59) v1(30.07,84.88) v1(30.07,66.46) v1(30.7,95.03) v1(30.7,75.35) v1(30.68,21.18) v1(32.59,43.86) v1(33,10.2) v1(33.28,14.5) v1(35.15,90.59) v1(35.15,81.06) v1(35.15,70.91) v1(35.57,134.73) v1(35.57,124.57) v1(35.57,119.49) v1(35.57,114.41) v1(35.57,104.25) v1(35.58,93.98) v1(35.83,76.62) v1(36.8,139.66) v1(37.05,218.86) v1(37.05,95.67) v1(37.05,63.92) v1(37.9,212.73) v1(37.9,209.93) v1(37.9,206.93) v1(37.9,204.33) v1(37.9,201.33) v1(37.9,195.73) v1(37.9,192.73) v1(37.9,189.93) v1(37.9,187.13) v1(37.9,184.33) v1(37.9,181.33) v1(37.9,178.53) v1(37.86,14) v1(38.14,54.02) v1(38.32,216.32) v1(38.64,27.59) v1(38.95,164.88) v1(38.95,161.07) v1(39.5,60.43) v1(39.59,175.04) v1(39.59,79.16) v1(39.59,76.62) v1(39.64,5.6) v1(39.88,64.3) v1(39.96,7.83) v1(40.08,90.97) v1(40.23,138.22) v1(40.23,70.27) v1(41.49,160.44) v1(41.46,10.41) v1(41.9,177.73) v1(42.4,112.23) v1(42.4,92.03) v1(42.5,147.83) v1(42.5,137.43) v1(42.5,70.33) v1(42.77,212.51) v1(42.77,206.79) v1(42.77,201.08) v1(42.77,189.65) v1(42.77,183.94) v1(42.75,43.86) v1(42.9,195.33) v1(43.1,181.53) v1(44.03,218.22) v1(44.03,173.14) v1(44.3,147.83) v1(44.3,131.53) v1(44.3,95.33) v1(44.3,66.93) v1(44.4,106.03) v1(45.4,57.43) v1(45.75,20.48) v1(46.1,181.53) v1(46.2,154.73) v1(46.2,135.13) v1(46.3,147.83) v1(46.3,111.73) v1(46.3,90.83) v1(46.3,63.83) v1(46.58,169.33) v1(46.7,176.93) v1(48.11,101.13) v1(48.3,53.96) v1(48.5,138.33) v1(48.48,131.23) v1(48.48,116.62) v1(48.48,90.59) v1(48.48,79.16) v1(48.7,69.89) v1(49.12,209.97) v1(49.12,204.25) v1(49.12,198.54) v1(49.12,192.82) v1(49.12,187.11) v1(49.38,58.93) v1(50.04,64.3) v1(49.96,30.64) v1(50.38,206.79) v1(50.38,201.08) v1(50.38,195.37) v1(50.38,189.65) v1(50.38,183.94) v1(50.46,5.6) v1(50.75,105.47) v1(50.98,213.18) v1(51.62,10.32) v1(51.66,178.22) v1(51.66,171.87) v1(51.66,159.81) v1(51.66,153.46) v1(51.66,147.74) v1(51.7,139.93) v1(51.66,122.97) v1(51.66,90.59) v1(51.66,79.16) v1(52.29,218.22) v1(52.73,44.81) v1(52.98,214.68) v1(53.56,182.03) v1(53.8,116.63) v1(53.8,94.83) v1(53.77,69.7) v1(53.9,151.73) v1(53.9,138.53) v1(54.44,58.46) v1(55.12,64.3) v1(55.58,184.28) v1(55.8,153.73) v1(55.8,133.03) v1(55.8,105.23) v1(55.78,90.48) v1(56.1,202.99) v1(56.1,197.27) v1(56.73,206.16) v1(56.78,214.48) v1(57.58,188.08) v1(57.61,129.5) v1(57.7,151.73) v1(57.7,100.03) v1(58.01,79.16) v1(58.68,209.08) v1(58.85,69.89) v1(59.27,192.82) v1(59.6,153.73) v1(59.6,139.33) v1(59.6,124.33) v1(59.6,108.33) v1(59.8,36.71) v1(59.91,218.22) v1(60.12,30.64) v1(60.2,64.3) v1(60.99,20.48) v1(61.18,196) v1(61.5,151.73) v1(61.5,133.53) v1(61.5,114.73) v1(61.48,98.38) v1(61.77,10.32) v1(62.45,213.78) v1(62.52,47.03) v1(62.7,7.73) v1(63.09,199.81) v1(63.4,153.73) v1(63.4,136.03) v1(63.38,124.28) v1(63.4,103.23) v1(63.72,76.62) v1(63.89,69.28) v1(64.36,79.16) v1(64.44,57.19) v1(65.08,206.28) v1(65.18,202.48) v1(65.3,151.33) v1(65.28,131.08) v1(65.28,113.58) v1(65.28,64.3) v1(66.36,5.6) v1(67.03,218.16) v1(67.03,210.25) v1(67.21,73.12) v1(67.28,139.66) v1(67.53,205.53) v1(67.53,196.63) v1(67.53,186.47) v1(67.53,174.41) v1(67.53,165.52) v1(67.53,156.63) v1(67.53,147.74) v1(67.53,109) v1(67.77,129.5) v1(68.17,119.8) v1(68.17,99.48) v1(69.22,35.61) v1(69.44,138.22) v1(70.28,30.64) v1(70.36,64.3) v1(70.7,79.16) v1(71.15,20.48) v1(71.28,76.17) v1(71.83,91.51) v1(71.94,10.32) v1(72.36,139.66) v1(72.66,46.54) v1(72.78,147.43) v1(74.6,57.19) v1(75.44,64.3) v1(75.78,71.54) v1(76.36,76.17) v1(76.63,119.34) v1(77.17,5.6) v1(77.93,129.5) v1(78.96,79.16) v1(79.84,39.36) v1(80.13,58.46) v1(80.52,64.3) v1(81.31,20.48) v1(81.44,76.17) v1(81.96,90.97) v1(82.09,10.32) v1(82.4,101.13) v1(82.52,139.66) v1(82.5,7.73) v1(82.56,51.01) v1(84.04,112.18) v1(84.88,147.43) v1(85.31,68.36) v1(85.6,64.3) v1(86.52,76.17) v1(87.02,32.17) v1(87.03,5.6) v1(87.13,51.1) v1(88.09,129.5) v1(88.48,79.16) v1(88.48,44.87) v1(90.29,58.46) v1(90.68,64.3) v1(91.47,20.48) v1(91.6,76.17) v1(91.87,121.02) v1(92.12,90.97) v1(92.25,110.88) v1(92.25,10.32) v1(92.56,101.13) v1(92.67,139.83) v1(93.56,147.1) v1(94.21,24.99) v1(94.31,43.91) v1(94.42,67.74) v1(95.14,59.99) v1(95.5,140.33) v1(96.57,5.6) v1(96.68,76.17) v1(96.93,36.64) v1(97.7,147.33) v1(97.9,138.93) v1(98.01,79.16) v1(98.01,71.33) v1(99.9,138.93) v1(101.5,36.73) v1(101.6,74.92) v1(102.03,130.94) v1(102.03,120.78) v1(102.32,67.17) v1(102.3,7.73) v1(102.42,10.32) v1(102.7,147.33) v1(102.7,140.33) v1(103.09,49.95) v1(103.72,90.59) v1(103.95,110.99) v1(103.98,105.91) v1(103.98,100.83) v1(103.98,95.75) v1(104.11,29.45) v1(104.36,79.16) v1(104.36,76.62) v1(105.46,55.94) v1(106.3,140.33) v1(106.3,132.73) v1(106.3,117.13) v1(106.42,5.6) v1(106.5,122.33) v1(106.6,92.33) v1(106.58,79.13) v1(106.7,105.33) v1(106.9,108.53) v1(107.1,118.93) v1(107.8,115.73) v1(108.15,44.45) v1(108.5,104.13) v1(108.5,93.53) v1(108.48,79.13) v1(108.68,29.55) v1(108.81,73.44) v1(108.9,117.33) v1(109.7,111.23) v1(109.8,128.43) v1(109.9,147.33) v1(109.9,140.33) v1(109.9,136.93) v1(109.9,125.13) v1(110.1,107.53) v1(110.26,64.47) v1(110.71,79.16) v1(110.71,76.62) v1(110.9,126.33) v1(111.3,138.53) v1(111.34,90.59) v1(111.3,22.27) v1(111.5,111.23) v1(112.58,10.32) v1(112.7,110.33) v1(112.9,112.53) v1(113.3,138.53) v1(113.3,122.53) v1(113.84,101.69) v1(114,117.53) v1(114.8,126.43) v1(114.9,137.13) v1(114.9,134.73) v1(114.9,128.73) v1(115.5,140.33) v1(115.86,22.36) v1(116.42,79.16) v1(116.48,45.63) v1(116.92,5.6) v1(117.3,126.43) v1(117.4,111.23) v1(117.7,106.73) v1(118.3,147.33) v1(118.3,120.73) v1(118.3,117.53) v1(118.33,55.43) v1(118.68,15.29) v1(118.8,127.93) v1(118.9,105.53) v1(118.92,101.64) v1(119.3,137.43) v1(119.33,76.17) v1(119.7,122.53) v1(120.19,65.28) v1(120.7,116.33) v1(120.74,23.78) v1(121.06,90.97) v1(121.9,119.93) v1(122.1,140.33) v1(122.1,133.93) v1(122.1,128.73) v1(122.14,110.91) v1(122.14,108.37) v1(122.3,124.13) v1(122.3,7.73) v1(122.73,10.32) v1(123.1,105.53) v1(123.3,121.33) v1(123.41,79.16) v1(123.76,15.21) v1(124.3,115.93) v1(124.4,20.25) v1(124.68,96.31) v1(125.1,111.33) v1(125.6,108.53) v1(125.9,142.33) v1(125.9,129.13) v1(125.9,105.63) v1(125.95,134.41) v1(126.1,115.53) v1(126.13,90.73) v1(126.7,147.33) v1(126.9,111.13) v1(127.3,138.43) v1(127.5,124.33) v1(127.86,32.17) v1(128.05,5.6) v1(128.1,129.13) v1(128.56,41.58) v1(128.7,142.33) v1(128.7,119.73) v1(128.7,115.93) v1(129.08,101.64) v1(129.12,24.55) v1(129.3,133.53) v1(129.26,104.94) v1(129.48,79.18) v1(130,109.33) v1(130.2,129.13) v1(130.4,87.42) v1(130.4,22.01) v1(130.7,124.53) v1(131.4,115.53) v1(131.4,111.43) v1(131.38,62.68) v1(131.38,60.18) v1(132.3,132.93) v1(132.5,142.33) v1(132.5,138.13) v1(132.9,129.13) v1(132.9,10.32) v1(133.31,35.09) v1(133.57,72.81) v1(133.57,70.27) v1(133.57,65.19) v1(133.57,52.49) v1(133.57,44.87) v1(133.7,120.93) v1(133.9,138.13) v1(134.21,84.88) v1(134.8,104.43) v1(134.84,28.36) v1(134.84,16.3) v1(134.9,7.73) v1(135.1,142.33) v1(135.1,138.13) v1(135.1,94.73) v1(135.47,79.16) v1(135.47,75.35) v1(135.47,24.55) v1(135.7,129.13) v1(135.8,114.93) v1(135.9,124.53) v1(135.9,120.13) v1(136.1,133.33) v1(136.81,55.41) v1(137.1,147.33) v1(137.1,130.73) v1(137.7,129.13) v1(138.01,92.5) v1(138.02,52.11) v1(138.39,35.09) v1(138.7,41.95) v1(138.9,142.33) v1(138.9,138.13) v1(139.24,101.64) v1(139.3,116.93) v1(139.5,124.21) v1(139.92,113.45) v1(139.92,95.67) v1(139.92,88.05) v1(139.92,85.51) v1(139.92,82.97) v1(139.92,80.43) v1(139.92,72.81) v1(139.92,62.65) v1(139.92,32.17) v1(139.92,22.01) v1(140.3,107.93) v1(140.5,137.53) v1(140.5,133.53) v1(141.4,7.83) v1(141.54,66.24) v1(141.72,124.21) v1(141.72,116.58) v1(142.19,45.92) v1(142.38,59.48) v1(142.39,12.84) v1(142.36,5.6) v1(143.36,146.66) v1(143.42,35.76) v1(143.73,25.82) v1(143.8,142.93) v1(143.8,104.43) v1(144.1,132.13) v1(144.3,137.53) v1(144.27,123.74) v1(144.37,114.5) v1(144.37,76.62) v1(144.8,119.43) v1(145,91.86) v1(145,82.97) v1(145,20.74) v1(145.12,109.09) v1(145.3,31.93) v1(145.5,72.73) v1(145.5,52.33) v1(145.5,41.93) v1(145.7,135.93) v1(145.7,130.33) v1(145.7,62.33) v1(146.2,129.03) v1(146.3,124.43) v1(147.5,14.13) v1(147.84,38.28) v1(148.03,139.58) v1(148.03,134.5) v1(148.03,129.42) v1(148,127.63) v1(148.03,120.32) v1(148.5,48.53) v1(148.7,147.33) v1(148.71,110.21) v1(148.7,78.73) v1(148.7,58.73) v1(148.9,68.73) v1(149.4,101.64) v1(149.57,20.02) v1(149.9,13.13) v1(150.5,104.33) v1(150.97,24.91) v1(151.35,30.27) v1(151.58,100.36) v1(151.58,92.41) v1(151.58,78.1) v1(151.58,62.84) v1(151.58,45.99) v1(153.9,100.93) v1(153.9,82.33) v1(153.9,67.13) v1(153.9,58.53) v1(153.9,50.13) v1(153.9,41.93) v1(153.9,31.93) v1(153.9,20.53) v1(156.35,101.64) v1(156.35,85.42) v1(156.35,70.47) v1(156.35,45.99) v1(156.35,27.54) v1(156.35,19.59) v1(156.43,57.57)
GNDE: length 75.7
  TOP w1: X1.C26 12.52,207.43 arc(12.76,207.48) 12.97,207.62 12.99,207.63 arc(13.19,207.77) 13.44,207.82 VD2.A
  BOTTOM w0.4: 6.71,217.59 X1.B30 ; X1.B30 8.97,217.59 ; X1.B30 7.84,218.72 ; X1.B30 7.84,216.46 ; X1.B24 7.84,203.48 ; X1.B24 6.71,202.35 ; X1.B24 7.84,201.22 ; X1.B24 8.97,202.35 ; 5.3,206.3 X1.A26 ; X1.A26 5.3,208.56 ; X1.A26 4.17,207.43 ; X1.A26 6.43,207.43 ; X1.B18 8.97,187.11 ; X1.B18 6.71,187.11 ; X1.B18 7.84,188.24 ; 6.71,207.43 X1.B26 ; X1.B26 8.97,207.43 ; X1.B26 7.84,206.3 ; X1.B26 7.84,208.56 ; 20.02,215.05 X3.2 ; X3.2 21.18,213.9 ; X3.2 22.33,215.05 ; X3.2 21.18,216.2 ; X1.B19 7.84,190.78 ; X1.B19 8.97,189.65 ; X1.B19 6.71,189.65 ; X1.B19 7.84,188.52 ; X1.B25 7.84,206.02 ; X1.B25 7.84,203.76 ; X1.B25 8.97,204.89 ; X1.B25 6.71,204.89 ; 18.64,213.92 X3.1 ; X3.1 18.64,216.18 ; X3.1 17.51,215.05 ; X3.1 19.76,215.05 ; 9.25,207.43 X1.C26 ; X1.C26 10.38,208.56 ; X1.C26 10.38,206.3 ; X1.C26 11.51,207.43 ; X1.B23 7.84,200.94 ; X1.B23 8.97,199.81 ; X1.B23 7.84,198.68 ; X1.B23 6.71,199.81 ; 7.84,193.6 X1.B21 ; X1.B21 6.71,194.73 ; X1.B21 7.84,195.86 ; X1.B21 8.97,194.73 ; 7.84,211.38 X1.B28 ; X1.B28 7.84,213.64 ; X1.B28 8.97,212.51 ; X1.B28 6.71,212.51 ; X1.B22 7.84,198.4 ; X1.B22 6.71,197.27 ; X1.B22 7.84,196.14 ; X1.B22 8.97,197.27 ; X1.B20 7.84,193.32 ; X1.B20 7.84,191.06 ; X1.B20 8.97,192.19 ; X1.B20 6.71,192.19 ; X1.B29 8.97,215.05 ; X1.B29 7.84,213.92 ; X1.B29 7.84,216.18 ; X1.B29 6.71,215.05
GNDR: length 20.2
  TOP w0.4: C33.2 v1(14.19,173.19) ; DD4.15 v1(25.97,152.82) ; DD4.9 v1(25.97,160.44) ; C32.2 v1(20.8,170.03) ; v1(25.04,153.47) 24.97,153.47 24.54,153.9 arc(24.33,154.04) 24.09,154.09 C31.2
  BOTTOM w0.4: DA6.4 33.24,170.48 ; DA6.4 33.24,168.18 ; DA6.4 32.09,169.33 ; X1.C13 10.38,175.56 ; X1.C13 10.38,173.26 ; X1.C13 9.23,174.41 ; X1.C13 11.53,174.41 ; X1.A13 6.45,174.41 ; X1.A13 5.3,173.26 ; X1.A13 5.3,175.56 ; X1.A13 4.15,174.41
1#PRD: length 8.9
  TOP w0.4: R15.2 X1.C23 9.3,200.89 arc(9.09,201.03) 8.85,201.08 6.83,201.08 arc(6.59,201.03) 6.38,200.89 X1.A23
1#PRM: length 8.9
  TOP w0.4: X1.A22 6.38,198.35 arc(6.59,198.49) 6.83,198.54 8.85,198.54 arc(9.09,198.49) 9.3,198.35 X1.C22 R16.2
1#WARN: length 8.9
  TOP w0.4: X1.A24 6.38,203.43 arc(6.59,203.57) 6.83,203.62 8.85,203.62 arc(9.09,203.57) 9.3,203.43 X1.C24 R14.2
1ALARM: length 8.9
  TOP w0.4: R13.2 X1.C25 9.3,205.97 arc(9.09,206.11) 8.85,206.16 6.83,206.16 arc(6.59,206.11) 6.38,205.97 X1.A25
1CLEAR: length 8.9
  TOP w0.4: R18.1 X1.C20 9.3,193.27 arc(9.09,193.41) 8.85,193.46 6.83,193.46 arc(6.59,193.41) 6.38,193.27 X1.A20
1CTRLTM: length 8.9
  TOP w0.4: R17.1 X1.C19 9.3,190.73 arc(9.09,190.87) 8.85,190.92 6.83,190.92 arc(6.59,190.87) 6.38,190.73 X1.A19
1PUSK: length 8.9
  TOP w0.4: X1.A21 6.38,195.81 arc(6.59,195.95) 6.83,196 8.85,196 arc(9.09,195.95) 9.3,195.81 X1.C21 R19.1
1RXDR: length 6.1
  TOP w0.25: X1.C8 9.3,160.63 arc(9.09,160.49) 8.85,160.44 6.83,160.44 arc(6.59,160.49) 6.38,160.63 X1.A8
1RXLN: length 8.6
  TOP w0.25: X1.A10 6.38,167.87 arc(6.59,168.01) 6.83,168.06 8.85,168.06 arc(9.09,168.01) 9.3,167.87 X1.C10 RR8.2
1RXTM: length 11.6
  TOP w0.25: X1.A12 6.38,172.95 arc(6.59,173.09) 6.83,173.14 8.85,173.14 arc(9.09,173.09) 9.3,172.95 X1.C12 11.39,171.87 arc(11.63,171.82) 11.84,171.68 12.73,170.79 arc(12.87,170.58) 12.92,170.34 RR8.1
1TXDR: length 6.1
  TOP w0.25: X1.A7 6.38,158.09 arc(6.59,157.95) 6.83,157.9 8.85,157.9 arc(9.09,157.95) 9.3,158.09 X1.C7
1TXLN: length 8.6
  TOP w0.25: RR8.4 11.46,164.2 11.41,164.25 X1.C9 9.3,163.17 arc(9.09,163.03) 8.85,162.98 6.83,162.98 arc(6.59,163.03) 6.38,163.17 X1.A9
1TXTM: length 20.8
  TOP w0.25: X1.C11 9.3,170.41 arc(9.09,170.55) 8.85,170.6 6.83,170.6 arc(6.59,170.55) 6.38,170.41 X1.A11 4.03,169.33 arc(3.58,169.14) 3.4,168.69 3.4,166.16 arc(3.58,165.71) 4.03,165.52 RR8.3
+5B: length 345.8
  TOP w0.25: RR4.5 RR4.6 RR4.8 ; RR5.5 RR5.6 RR5.7 RR5.8 ; RR3.8 RR3.7 RR3.6 RR3.5
  TOP w0.4: R43.1 v1(44.67,202.99) ; DD5.5 21.89,95.09 arc(21.65,95.05) 21.44,94.91 21.12,94.59 arc(20.91,94.45) 20.67,94.4 C38.1 19.91,95.41 arc(19.95,95.65) 20.09,95.86 20.54,96.31 ; 33.24,92.5 33.45,92.28 C3.1 37.05,91.26 arc(37.1,91.02) 37.24,90.81 DD1.20 ; R50.2 R49.2 40.8,150.6 arc(40.56,150.65) 40.35,150.79 39.78,151.36 arc(39.57,151.5) 39.33,151.55 v1(38.95,151.55) ; 150.08,86.14 150.08,96.31 arc(149.89,96.75) 149.44,96.94 VD17.A ; 150.08,86.14 150.08,77.52 arc(150.03,77.27) 149.89,77.07 149.44,76.62 ; 150.08,86.14 149.63,86.59 arc(149.43,86.73) 149.18,86.78 VD10.A ; 149.44,76.62 VD11.A 147.09,77.7 arc(146.89,77.84) 146.64,77.89 64.99,77.89 ; 149.44,76.62 149.89,76.17 arc(150.03,75.97) 150.08,75.72 150.08,67.09 ; VD14.A 149.18,46.14 arc(149.43,46.19) 149.63,46.33 150.08,46.77 ; 32.6,77.25 31.97,76.62 DD2.11 ; 150.08,36.62 150.08,26.86 arc(150.03,26.62) 149.89,26.41 149.49,26.01 arc(149.28,25.87) 149.04,25.82 VD16.A ; 150.08,36.62 150.08,46.77 ; 150.08,36.62 arc(149.89,36.17) 149.44,35.98 VD15.A ; 32.6,65.83 31.97,65.19 DD2.20 26.94,65.19 arc(26.8,65.16) 26.68,65.08 26.68,65.08 arc(26.56,65) 26.42,64.97 25.62,64.97 ; 150.08,56.94 150.08,67.09 ; 150.08,56.94 150.08,46.77 ; 150.08,56.94 149.63,56.49 arc(149.43,56.35) 149.18,56.3 VD13.A ; 150.08,67.09 149.63,66.65 arc(149.43,66.51) 149.18,66.46 VD12.A ; 49.12,159.17 v1(38.95,159.17) DD4.7 ; 49.12,162.34 48.9,162.56 C29.1 C28.1 45.15,164.62 arc(44.9,164.57) 44.7,164.43 L2.1 ; v1(38.95,151.55) C30.1 ; v1(38.95,151.55) DD4.1 ; 20.54,96.31 18.26,96.31 arc(18.02,96.26) 17.81,96.12 14.05,92.35 arc(13.91,92.15) 13.86,91.9 RR4.5 ; 20.54,96.31 31.97,96.31 ; 64.99,77.89 33.24,77.89 ; 64.99,77.89 65.02,77.86 RR5.8 ; 33.24,79.8 33.69,79.35 arc(33.9,79.21) 34.14,79.16 DD1.11 ; R44.1 v1(44.67,197.27) ; v1(44.67,208.7) R42.1 ; RR4.8 RR3.5
  BOTTOM w0.4: v1(38.95,159.17) 37.69,159.17 arc(37.24,158.98) 37.05,158.53 37.05,152.19 arc(37.24,151.74) 37.69,151.55 v1(38.95,151.55)
  BOTTOM w1: v1(44.67,179.49) v1(44.67,197.27) v1(44.67,202.99) v1(44.67,208.7)
+5BA: length 91.2
  TOP w0.25: 133.57,131.82 133.57,132.5 arc(133.76,132.95) 134.21,133.13 134.84,133.13 ; 133.57,131.82 133.57,131.23 arc(133.72,130.88) 134.07,130.73 DA4.7 ; 133.57,131.82 133.97,131.42 arc(134.18,131.28) 134.42,131.23 DA4.8 ; 134.79,134.78 134.84,134.82 ; C18.2 111.39,135.46 C17.1 111.34,134.58 arc(111.23,134.3) 110.94,134.18 110.25,134.18 arc(109.97,134.06) 109.85,133.78 109.85,132.93 arc(109.88,132.85) 109.95,132.82 DA3.2 ; 114.21,132.18 DA3.6 ; DA4.10 135.13,132.58 arc(135.09,132.82) 134.95,133.03
  TOP w0.4: 140.56,135.84 140.56,135.68 arc(140.37,135.23) 139.92,135.04 139.89,135.04 139.78,134.93 arc(139.67,134.85) 139.53,134.82 138.65,134.82 ; R48.2 C12.2 ; C12.2 107.29,113.87 arc(107.53,113.82) 107.74,113.68 107.79,113.64 arc(107.99,113.5) 108.24,113.45 DA1.5 109.44,113.45 arc(109.89,113.64) 110.08,114.08 110.08,114.72 arc(110.26,115.17) 110.71,115.36 117.4,115.36 117.42,115.38 119.24,115.38 119.26,115.36 123.15,115.36 arc(123.39,115.31) 123.6,115.17 123.86,114.91 arc(124,114.7) 124.05,114.46 124.05,112.81 ; C12.2 105.21,113.87 105,114.08 ; R33.2 124.36,127.73 124.05,128.06 ; C2.1 99.86,142.29 C1.1 ; 134.95,133.03 134.84,133.13 134.84,134.82 ; 124.05,112.81 124.05,109.86 ; 124.05,112.81 123.92,112.69 arc(123.71,112.55) 123.47,112.5 R25.2 ; 124.05,109.86 126.17,109.86 126.35,109.67 DD3.5 ; 124.05,109.86 arc(123.93,109.93) 123.8,109.95 ; 134.79,134.78 C19.1 130.66,134.78 130.4,135.04 ; C17.1 108.44,135.41 108.17,135.68 ; C18.2 113.25,134.84 arc(113.3,134.6) 113.44,134.4 113.7,134.13 arc(113.84,133.93) 113.89,133.68 113.89,132.5 arc(113.98,132.27) 114.21,132.18 ; DA2.8 114.79,124.41 arc(114.55,124.36) 114.34,124.22 114.34,124.22 arc(114.13,124.08) 113.89,124.03 C13.2 108.39,124.03 108.17,124.25 ; MH4.1 124.62,122.97 124.47,123.13 arc(124.34,123.31) 124.3,123.53
  TOP w0.5: L1.2 96.77,143.93 ; L1.2 95.31,141.78 ; L1.2 95.31,146.08 ; 137.5,135.28 138.65,134.82 137.5,134.82 ; 96.83,142.29 C1.1 98.01,143.32 ; 99.92,143.24 C2.1 101.07,142.24
+5BR: length 69.1
  TOP w0.25: R52.2 R51.2 20.16,156.31 arc(20.4,156.27) 20.61,156.13 21.62,155.12 arc(21.76,154.91) 21.8,154.67 21.8,153.61 arc(21.85,153.37) 21.99,153.16 22.58,152.58 arc(22.78,152.44) 23.03,152.39 C31.1
  TOP w0.4: 11.65,175.68 12.02,175.68 arc(12.27,175.73) 12.47,175.87 12.53,175.92 arc(12.74,176.06) 12.98,176.11 C33.1 15.36,176.11 arc(15.6,176.06) 15.81,175.92 18.61,173.12 arc(18.75,172.91) 18.8,172.67 18.8,168.19 arc(18.85,167.95) 18.99,167.74 19.51,167.22 arc(19.72,167.08) 19.96,167.03 C32.1 ; 11.65,175.68 X1.C14 ; 11.65,175.68 6.83,175.68 arc(6.59,175.73) 6.38,175.87 X1.A14 ; C32.1 20.8,162.69 arc(20.85,162.45) 20.99,162.24 23.87,159.36 arc(24.08,159.22) 24.32,159.17 v1(25.97,159.17) DD4.10 ; C32.1 21.94,167.03 arc(22.18,166.98) 22.39,166.84 22.89,166.34 arc(23.03,166.13) 23.08,165.89 L3.2 ; C31.1 24.34,152.39 arc(24.67,152.26) 24.8,151.93 24.8,151.9 arc(24.9,151.66) 25.14,151.56 v1(25.97,151.56) 27.74,151.56 DD4.16
  BOTTOM w0.4: v1(25.97,159.17) 27.52,159.17 arc(27.97,158.98) 28.16,158.53 28.16,152.19 arc(27.98,151.74) 27.54,151.56 v1(25.97,151.56)
+24BE: length 73.2
  TOP w0.4: AV3.4 27.08,202.65 arc(26.94,202.44) 26.89,202.2 v1(26.89,201.61) ; 27.52,182.66 27.08,183.11 arc(26.94,183.32) 26.89,183.56 v1(26.89,184.04) ; AV2.4 27.08,208.36 arc(26.94,208.16) 26.89,207.91 v1(26.89,207.32) ; AV7.1 27.08,194.54 arc(26.94,194.75) 26.89,194.99 v1(26.89,195.63) 26.89,196.48 arc(26.94,196.72) 27.08,196.93 AV4.4 ; v1(26.89,213.04) 26.89,213.63 arc(26.94,213.87) 27.08,214.08 AV1.4 ; AV6.1 27.08,188.83 arc(26.94,189.03) 26.89,189.28 v1(26.89,189.65)
  TOP w1: v1(21.18,218.22) 16.09,218.22 arc(15.84,218.18) 15.64,218.04 15.01,217.41 arc(14.87,217.2) 14.82,216.96 VD2.C 12.86,210.16 arc(12.65,210.02) 12.41,209.97 X1.C27 X1.B27 X1.A27
  BOTTOM w1: v1(21.18,218.22) 26.25,218.22 arc(26.7,218.04) 26.89,217.59 v1(26.89,213.04) v1(26.89,207.32) v1(26.89,201.61) v1(26.89,195.63) v1(26.89,189.65) v1(26.89,184.04)
BUSR4: length 17.1
  TOP w0.25: X2.A28 6.38,78.08 arc(6.59,77.94) 6.83,77.89 17.74,77.89 arc(17.98,77.84) 18.19,77.7 19.72,76.17 arc(19.92,76.03) 20.17,75.98 21.18,75.98
BUSR5: length 16.6
  TOP w0.25: X2.A27 6.38,75.54 arc(6.59,75.4) 6.83,75.35 18.96,75.35 arc(19.2,75.3) 19.41,75.16 19.72,74.85 arc(19.92,74.71) 20.17,74.67 21.18,74.67
BUSR6: length 16.6
  TOP w0.25: 21.18,73.39 20.17,73.39 arc(19.92,73.35) 19.72,73.21 19.51,73 arc(19.3,72.86) 19.06,72.81 6.83,72.81 arc(6.59,72.86) 6.38,73 X2.A26
BUSR7: length 17.1
  TOP w0.25: X2.A25 6.38,70.46 arc(6.59,70.32) 6.83,70.27 17.74,70.27 arc(17.98,70.32) 18.19,70.46 19.62,71.89 arc(19.82,72.03) 20.07,72.08 21.18,72.08
BUSW6: length 2.9
  TOP w0.25: X2.C26 R23.1
BUSW7: length 2.9
  TOP w0.25: X2.C25 R22.1
D#AC: length 154.8
  TOP w0.25: v1(128.49,43.6) R6.1 ; VD4.1 v1(66.26,92.5) ; DD1.17 v1(66.26,86.78) v1(128.49,86.78)
  BOTTOM w0.25: v1(66.26,92.5) v1(66.26,86.78) ; v1(128.49,86.78) v1(128.49,43.6)
D#CONTROL: length 123.3
  TOP w0.25: v1(136.75,94.4) R1.1 ; R54.1 138.28,81.7 arc(138.03,81.65) 137.83,81.51 v1(136.75,80.43) DD1.12
  BOTTOM w0.25: v1(136.75,94.4) v1(136.75,80.43)
D#CURRENT: length 238.4
  TOP w0.25: VD6.1 v1(58.64,92.5) ; DD1.13 v1(58.64,81.7) 135.22,81.7 arc(135.4,81.77) 135.47,81.95 135.47,83.61 arc(135.66,84.05) 136.11,84.24 R2.1 ; R12.1 49.49,199.81 arc(49.73,199.76) 49.94,199.62 58.45,191.11 arc(58.59,190.9) 58.64,190.66 v1(58.64,148.38)
  BOTTOM w0.25: v1(58.64,81.7) v1(58.64,92.5) v1(58.64,148.38)
D#DISTPRM: length 178.7
  TOP w0.25: v1(130.4,30.9) R57.1 ; DD1.16 v1(68.17,85.51) v1(130.4,85.51) ; v1(68.17,92.5) 68.17,93.64 68.16,93.65 VD4.2 ; v1(130.4,53.76) R5.1
  BOTTOM w0.25: v1(130.4,85.51) v1(130.4,53.76) v1(130.4,30.9) ; v1(68.17,92.5) v1(68.17,85.51)
D#HFRESTORE: length 250.4
  TOP w0.25: v1(134.21,74.08) R3.1 ; VD6.2 v1(60.54,92.5) ; v1(60.55,148.38) 60.55,194.47 arc(60.5,194.71) 60.36,194.92 49.94,205.34 arc(49.73,205.48) 49.49,205.53 R11.1 ; v1(134.21,82.97) v1(60.55,82.97) DD1.14
  BOTTOM w0.25: v1(134.21,82.97) v1(134.21,74.08) ; v1(60.55,82.97) 60.55,91.74 60.54,91.75 v1(60.54,92.5) 60.54,93.25 60.55,93.26 v1(60.55,148.38)
D#SELFPRM: length 196.8
  TOP w0.25: VD5.1 70.07,93.65 70.06,93.64 v1(70.06,92.5) ; DD1.15 70.7,84.24 ; 70.7,84.24 v1(132.3,84.24) ; 70.7,84.24 70.7,84.25 v1(70.06,84.25) ; v1(132.3,51.22) R59.1 ; v1(132.3,20.74) R58.1 ; v1(132.3,63.92) R4.1
  BOTTOM w0.25: v1(132.3,20.74) v1(132.3,51.22) v1(132.3,63.92) v1(132.3,84.24) ; v1(70.06,92.5) v1(70.06,84.25)
D#WARN: length 312.5
  TOP w0.25: v1(62.45,92.5) VD3.1 ; DD1.18 v1(62.45,88.05) v1(126.58,88.05) ; v1(62.45,148.38) 62.45,198.28 arc(62.4,198.52) 62.26,198.73 49.94,211.05 arc(49.73,211.19) 49.49,211.24 R9.1 ; v1(126.58,33.44) R7.1 ; R56.1 v1(126.58,61.38)
  BOTTOM w0.25: v1(62.45,88.05) v1(62.45,92.5) v1(62.45,148.38) ; v1(126.58,88.05) v1(126.58,61.38) v1(126.58,33.44)
DALARM: length 327.7
  TOP w0.25: v1(64.36,148.38) 64.36,201.45 arc(64.31,201.69) 64.17,201.9 51.84,214.23 arc(51.64,214.37) 51.39,214.41 R41.1 ; v1(124.68,89.32) v1(64.36,89.32) DD1.19 ; R55.1 v1(124.68,71.54) ; v1(124.68,23.28) R8.1
  BOTTOM w0.25: v1(124.68,23.28) v1(124.68,71.54) v1(124.68,89.32) ; v1(64.36,89.32) v1(64.36,148.38)
EN_AMP: length 161
  TOP w0.25: v1(51.02,59.48) 51.47,59.92 arc(51.68,60.06) 51.92,60.11 93.44,60.11 93.51,60.19 arc(93.87,60.45) 94.2,60.74 v1(109.44,75.98) ; v1(109.44,91.22) 109.44,103.66 arc(109.49,103.91) 109.63,104.11 110.52,105.01 arc(110.73,105.15) 110.97,105.19 117.43,105.19 arc(117.68,105.15) 117.88,105.01 118.14,104.75 arc(118.35,104.61) 118.59,104.56 126.32,104.56 arc(126.57,104.61) 126.77,104.75 127.67,105.64 arc(127.81,105.85) 127.86,106.09 DD3.2 127.86,108.37 ; 127.86,108.37 129.54,108.37 arc(129.74,108.33) 129.92,108.21 arc(130.09,108.1) 130.3,108.06 131.66,108.06 ; 127.86,108.37 R24.1 ; RR5.3 60.99,72.76 60.94,72.81 v1(51.02,72.81) DD2.7
  BOTTOM w0.25: v1(109.44,91.22) v1(109.44,75.98) ; v1(51.02,72.81) v1(51.02,59.48)
EN_MCU: length 3.2
  TOP w0.25: R32.1 129.76,111.81 arc(129.71,111.56) 129.57,111.36 128.99,110.78 arc(128.85,110.57) 128.81,110.33 DD3.4
RXLN: length 18.5
  TOP w0.25: RR7.2 16.36,58.2 arc(16.11,58.25) 15.91,58.39 11.84,62.46 arc(11.63,62.6) 11.39,62.65 6.83,62.65 arc(6.59,62.7) 6.38,62.84 X2.A22
RXTALK: length 279.1
  TOP w0.25: C27.2 140.56,116.25 arc(140.6,116.01) 140.74,115.8 154.97,101.57 arc(155.11,101.37) 155.16,101.12 155.16,20.37 arc(155.11,20.13) 154.97,19.92 142.01,6.96 arc(141.81,6.82) 141.56,6.77 39.85,6.77 arc(39.61,6.82) 39.4,6.96 11.84,34.52 arc(11.63,34.66) 11.39,34.71 6.83,34.71 arc(6.59,34.76) 6.38,34.9 X2.A11
RXTM: length 18.5
  TOP w0.25: X2.A20 6.38,57.76 arc(6.59,57.62) 6.83,57.57 8.85,57.57 arc(9.09,57.62) 9.3,57.76 X2.C20 13.42,55.8 arc(13.62,55.66) 13.87,55.62 RR7.4
SOUT0: length 18.3
  TOP w0.25: RR3.1 17.93,79.75 17.98,79.69 v1(18.73,79.69) 21.18,79.69
  BOTTOM w0.25: X2.A29 6.38,80.62 arc(6.59,80.48) 6.83,80.43 16.47,80.43 arc(16.71,80.38) 16.92,80.24 17.28,79.88 arc(17.49,79.74) 17.73,79.69 v1(18.73,79.69)
SOUT1: length 13.3
  TOP w0.25: RR3.2 18.52,81.06 18.57,81.02 v1(19.32,81.02) 21.18,81.02
  BOTTOM w0.25: X2.C29 17.1,81.7 arc(17.35,81.65) 17.55,81.51 17.86,81.2 arc(18.07,81.06) 18.31,81.02 v1(19.32,81.02)
SOUT2: length 18.3
  TOP w0.25: 21.18,82.28 v1(18.68,82.28) 18.64,82.33 RR3.3
  BOTTOM w0.25: X2.A30 6.38,83.16 arc(6.59,83.02) 6.83,82.97 17.74,82.97 arc(17.98,82.92) 18.19,82.78 v1(18.68,82.28)
SOUT3: length 13.3
  TOP w0.25: 21.18,83.61 v1(19.27,83.61) 18.52,83.61 18.47,83.66 RR3.4
  BOTTOM w0.25: v1(19.27,83.61) 18.82,84.05 arc(18.62,84.19) 18.37,84.24 X2.C30
SOUT4: length 18.2
  TOP w0.25: 21.18,86.05 19.49,86.05 19.39,86.14 v1(18.64,86.14) 18.59,86.09 RR4.1
  BOTTOM w0.25: v1(18.64,86.14) 18.19,85.7 arc(17.98,85.56) 17.74,85.51 6.83,85.51 arc(6.59,85.56) 6.38,85.7 X2.A31
SOUT5: length 13.2
  TOP w0.25: 21.18,87.36 20.07,87.36 20.02,87.42 v1(19.27,87.42) 17.06,87.42
  BOTTOM w0.25: X2.C31 17.1,86.78 arc(17.35,86.83) 17.55,86.97 17.81,87.23 arc(18.02,87.37) 18.26,87.42 v1(19.27,87.42)
SOUT6: length 18.2
  TOP w0.25: 21.18,88.64 v1(18.68,88.64) 18.64,88.69 RR4.3
  BOTTOM w0.25: X2.A32 6.38,88.24 arc(6.59,88.1) 6.83,88.05 16.47,88.05 arc(16.71,88.1) 16.92,88.24 17.13,88.45 arc(17.34,88.59) 17.58,88.64 v1(18.68,88.64)
SOUT7: length 13.2
  TOP w0.25: RR4.4 18.47,90 18.52,89.95 v1(19.27,89.95) 21.18,89.95
  BOTTOM w0.25: X2.C32 17.62,89.32 arc(17.86,89.37) 18.07,89.51 18.33,89.77 arc(18.54,89.91) 18.78,89.95 v1(19.27,89.95)
TXLN: length 12.9
  TOP w0.25: RR7.1 16.94,59.52 arc(16.7,59.57) 16.49,59.71 12.47,63.73 arc(12.26,63.87) 12.02,63.92 X2.C22
TXTALK: length 276.3
  TOP w0.25: MH2.1 149.82,103.29 arc(150.06,103.24) 150.27,103.1 152.43,100.94 arc(152.57,100.73) 152.62,100.49 152.62,21 arc(152.57,20.76) 152.43,20.55 140.74,8.86 arc(140.54,8.72) 140.29,8.68 41.12,8.68 arc(40.88,8.72) 40.67,8.86 13.74,35.79 arc(13.54,35.93) 13.29,35.98 X2.C11
TXTM: length 19
  TOP w0.25: X2.A21 6.38,60.3 arc(6.59,60.16) 6.83,60.11 8.85,60.11 arc(9.09,60.16) 9.3,60.3 X2.C21 14.64,57.12 arc(14.84,56.98) 15.09,56.94 RR7.3
N00551: length 2.8
  TOP w0.4: R47.1 36.52,191.56
N01225: length 118.7
  TOP w0.25: R49.1 v1(41.49,154.09) DD4.3 ; v1(41.49,58.2) RR7.7
  BOTTOM w0.25: v1(41.49,154.09) v1(41.49,58.2)
N01244: length 126.1
  TOP w0.25: v1(45.3,59.48) 25.56,59.48 25.51,59.52 RR7.8 ; DD4.5 v1(45.3,156.63)
  BOTTOM w0.25: v1(45.3,156.63) v1(45.3,59.48)
N01250: length 134.9
  TOP w0.25: v1(47.21,55.66) 25.56,55.66 25.51,55.62 RR7.5 ; DD4.6 v1(47.21,157.9)
  BOTTOM w0.25: v1(47.21,157.9) v1(47.21,55.66)
N01425: length 17.8
  TOP w0.25: RR8.6 16.95,165.52 arc(17.24,165.4) 17.36,165.1 17.36,161.97 arc(17.41,161.73) 17.55,161.52 22.89,156.18 arc(23.1,156.04) 23.34,156 24.72,156 arc(24.97,155.95) 25.17,155.81 25.43,155.55 arc(25.64,155.41) 25.88,155.36 DD4.13
N01429: length 28.1
  TOP w0.25: DD4.12 23.98,156.63 arc(23.73,156.68) 23.53,156.82 18.19,162.16 arc(18.05,162.37) 18,162.61 18,165.47 arc(17.95,165.72) 17.81,165.92 17.13,166.6 arc(16.93,166.74) 16.68,166.79 RR8.7 15.29,166.79 arc(14.96,166.65) 14.82,166.32 14.82,161.34 arc(14.87,161.1) 15.01,160.89 16.54,159.36 arc(16.68,159.15) 16.73,158.91 16.73,158.22
